# Altium PCB DE-120824_1.PcbDoc
Units mil, origin at the board's own origin, x right, y up, seen from the top; angles counter-clockwise.
Board outline 2559.06 x 1377.95 mil, 2 copper layers (Top Layer, Bottom Layer); 20 components, 186 nets, 62 pads, 5 vias.
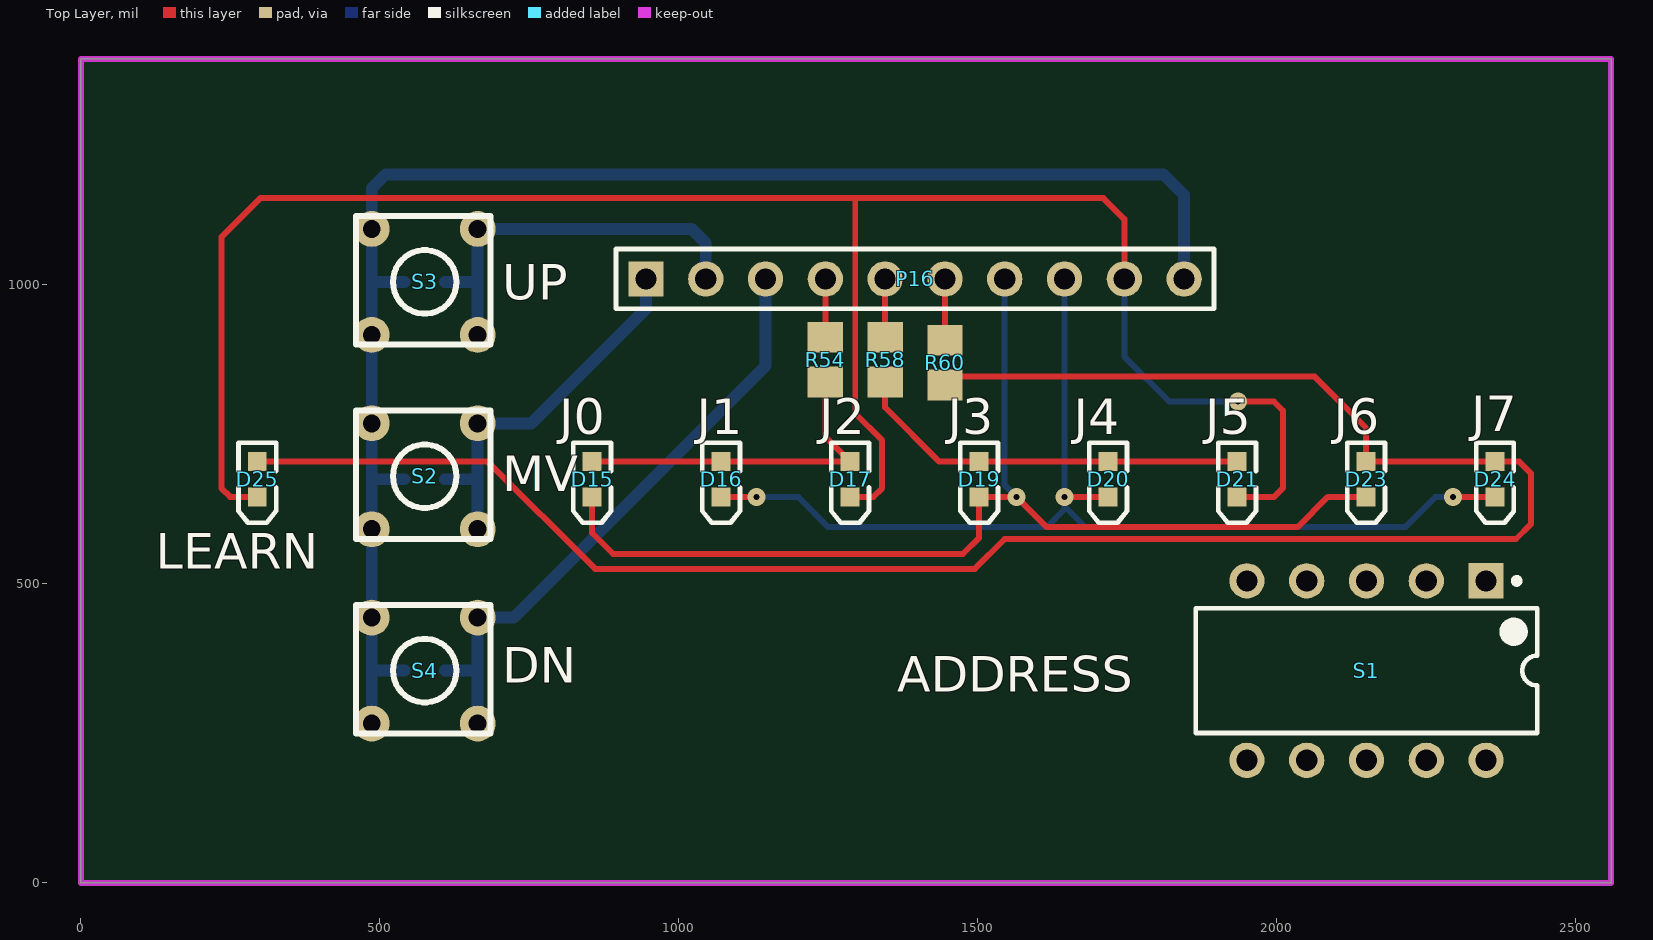
[diagram p0: Top Layer view]
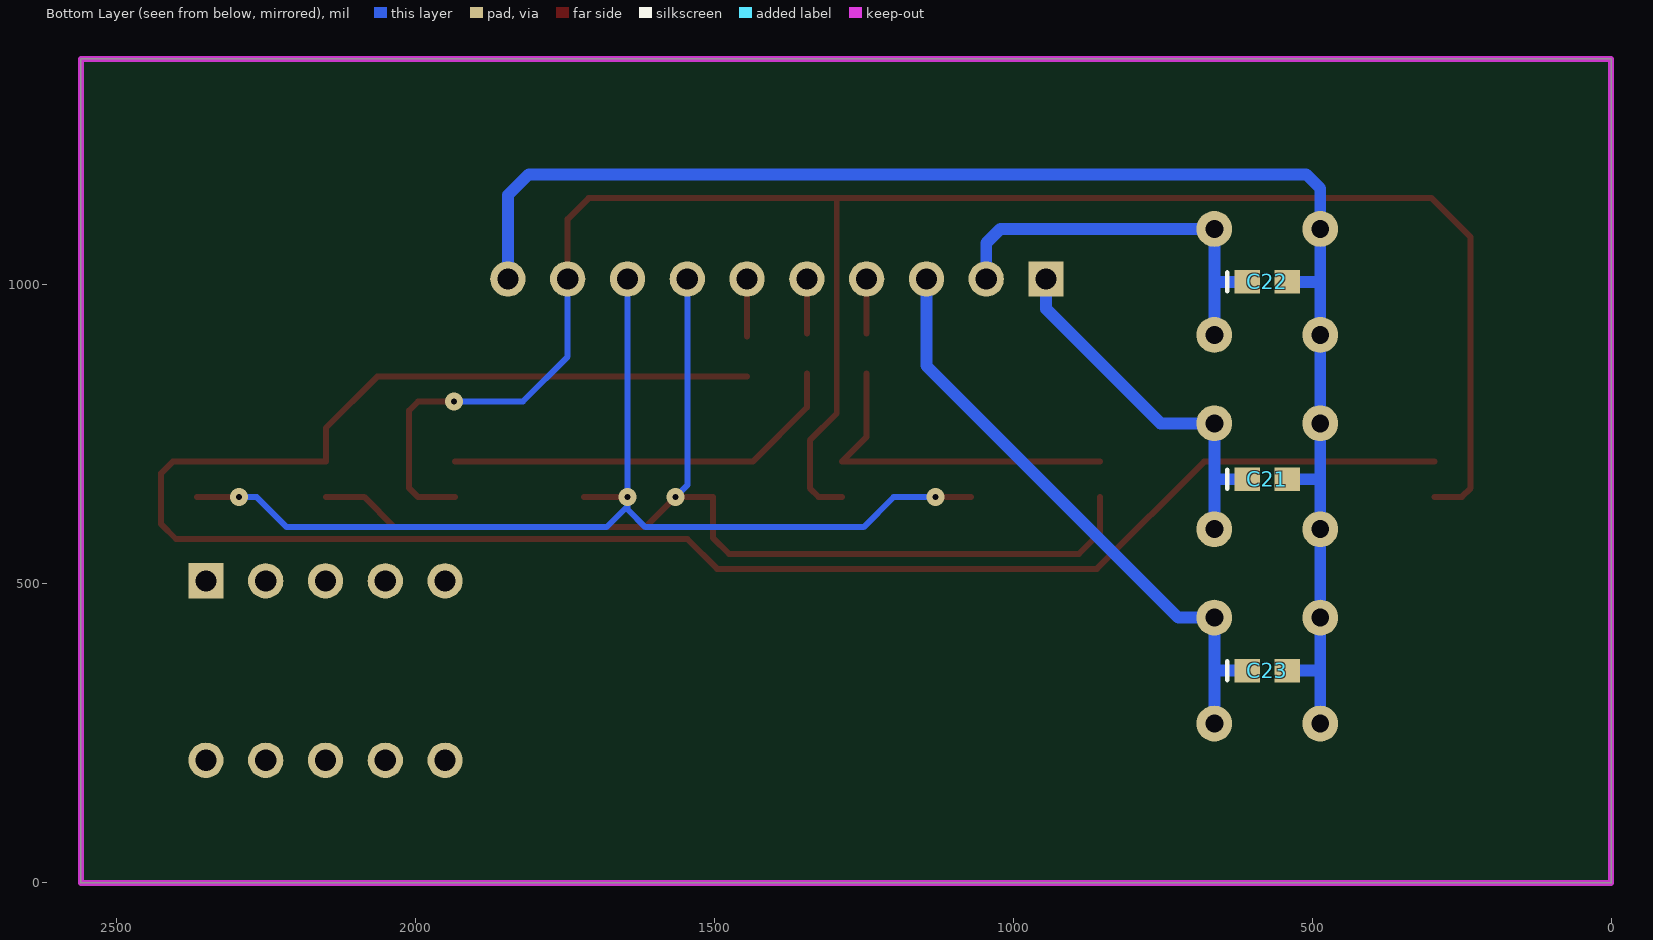
[diagram p1: Bottom Layer view, seen from below]

## Layer stack, top to bottom
Top Solder: solder mask 0.4, Solder Resist, Dk 3.5
Top Layer: signal copper 1.4
Dielectric 1: dielectric 12.6, FR-4, Dk 4.8
Bottom Layer: signal copper 1.4
Bottom Solder: solder mask 0.4, Solder Resist, Dk 3.5

## Board outline
0,0 0,1377.95 2559.06,1377.95 2559.06,0

## Design rules (kind name [scope] priority, off if disabled: settings)
Clearance [All] p1: gap=10 ignorepadtopadclearanceinfootprint=FALSE
PolygonConnect [All] p1: connectstyle=Relief reliefconductorwidth=10 reliefentries=4 polygonreliefangle="90 Angle" airgapwidth=10
RoutingVias [All] p1: holewidth=28 width=50 viastyle="Through Hole" minholewidth=10 minwidth=30 maxholewidth=28 maxwidth=50
SolderMaskExpansion [All] p1: expansion=4 istentingtop=FALSE
SupplyNets "Schematic Supply Nets_8" [InNet('GND1')] p1: voltage=0.000
SupplyNets "Schematic Supply Nets_7" [InNet('3V3')] p2: voltage=0.000
SupplyNets "Schematic Supply Nets_6" [InNet('L')] p3: voltage=0.000
SupplyNets "Schematic Supply Nets_5" [InNet('GND')] p4: voltage=0.000
SupplyNets "Schematic Supply Nets_4" [InNet('F')] p5: voltage=0.000
SupplyNets "Schematic Supply Nets_3" [InNet('F2')] p6: voltage=0.000
SupplyNets "Schematic Supply Nets_2" [InNet('F1')] p7: voltage=0.000
SupplyNets "Schematic Supply Nets_1" [InNet('12V')] p8: voltage=0.000
SupplyNets "Schematic Supply Nets" [InNet('5V')] p9: voltage=0.000
Width [All] p1: maxlimit=100 minlimit=10 preferedwidth=20
30 further rules are at their usual default settings.

## Classes and differential pairs
component class DE-120824: P2 P3 P4 P5 P6 P7 S1 U1 U5 U6

## Components (designator, comment, footprint, x,y, rotation, side; value= is the part's Value field where it differs from the comment)
C21 "C0603" 0603 575,675 r180 bottom value=100nF
C22 "C0603" 0603 575,1005 r180 bottom value=100nF
C23 "C0603" 0603 575,355 r180 bottom value=100nF
D15 "LED0" 1.6X0.8X0.8 855,675 r270 top
D16 "LED3" 1.6X0.8X0.8 1070.71,675 r270 top
D17 "LED6" 1.6X0.8X0.8 1286.43,675 r270 top
D19 "LED1" 1.6X0.8X0.8 1502.14,675 r270 top
D20 "LED4" 1.6X0.8X0.8 1717.86,675 r270 top
D21 "LED6" 1.6X0.8X0.8 1933.57,675 r270 top
D23 "LED2" 1.6X0.8X0.8 2149.29,675 r270 top
D24 "LED5" 1.6X0.8X0.8 2365,675 r270 top
D25 "LED7" 1.6X0.8X0.8 295,675 r270 top
P16 "Header 10" HDR1X10 945,1010 r0 top
R54 "220R" ERA-0805 1245,875 r270 top
R58 "220R" ERA-0805 1345,875 r270 top
R60 "220R" ERA-0805 1445,870 r270 top
S1 "SW DIP-5" N10A 2150,355 r270 top
S2 "MOVE" TACTILE_SWITCH 575,680 r180 top
S3 "UP" TACTILE_SWITCH 575,1005 r180 top
S4 "DOWN" TACTILE_SWITCH 575,355 r180 top

## Footprints (in the part's own frame and the unit in brackets; to place one, negate y for a bottom-side part, rotate by r counter-clockwise, add the part's x,y. Pads: shape width x height; smd on the part's side, far side on the other; paste and mask are expansions set on the pad)
1.6X0.8X0.8 [mm] "SM LED; 2 Flat Leads"
  rect 0.8x0.8 smd: 1(-0.75,0) 2(0.75,0)
  silkscreen extent -1.55,-0.8 1.85,0.8
0603 [mm] "Chip Capacitor; Body 1.6 x 0.8 mm (LxW typ)"
  rect 1.1x1 smd: 1(-0.85,0) 2(0.85,0)
  silkscreen extent -1.7,-0.4 -1.7,0.4
ERA-0805 [mm] "Chip Resistor; Body 2 x 1.3 mm (LxW typ)"
  rect 1.3x1.5 smd: 1(-0.95,0) 2(0.95,0)
HDR1X10 [mm] "Connector; Header; 10 Position"
  rect 1.5x1.5 hole 0.9: 1(0,0)
  round 1.5 hole 0.9: 2(2.54,0) 3(5.08,0) 4(7.62,0) 5(10.16,0) 6(12.7,0) 7(15.24,0) 8(17.78,0) 9(20.32,0) 10(22.86,0)
  silkscreen extent -1.27,-1.27 24.13,1.27
N10A [mm] "DIP; 10 Leads; Row Spacing 7.62 mm; Pitch 2.54 mm"
  rect 1.5x1.5 hole 0.9: 1(-3.81,5.08)
  round 1.5 hole 0.9: 2(-3.81,2.54) 3(-3.81,0) 4(-3.81,-2.54) 5(-3.81,-5.08) 6(3.81,-5.08) 7(3.81,-2.54) 8(3.81,0) 9(3.81,2.54) 10(3.81,5.08)
  silkscreen extent -3.93,-7.25 2.65,7.25, body extent -3.25,-7.25 3.25,7.25, height 5.08
TACTILE_SWITCH [mil] "PCB push button"
  round 60 hole 30: 1(-88.58,88.58) 2(88.58,88.58) 3(88.58,-88.58) 4(-88.58,-88.58)
  silkscreen extent -110,-110 115,105

## Part data
C21 C22 C23: "Ceramic Chip Capacitor - Standard", PackageDocument=Mar-2001, Code_IPC="1608 [0603]", Code_JEITA=0603, ComponentLink1Description="Manufacturer Link", ComponentLink1URL=http://www.kemet.com/, ComponentLink2Description=Datasheet, ComponentLink2URL=http://www.kemet.com/kemet/web/homepage/kechome.nsf/vapubfilesname/F3102TA.pdf/$file/F3102TA.pdf, DatasheetDocument=Mar-2001, LatestRevisionDate=19-Mar-2004, LatestRevisionNote="Silkscreen size reduced.", Note="Footprint corresponds to dimensions for bulk cassette packaging. This case size has tightened tolerances.", PackageReference=0603, Published=17-Jul-2002, Publisher="Altium Limited"
D15 D16 D17 D19 D20 D21 D23 D24 D25: library part HSMB-C190, "Blue Surface Mount Chip LED, Blue", LED_Colour=Blue, ComponentLink1Description="Manufacturer Link", ComponentLink1URL=http://www.avagotech.com/, ComponentLink2Description=Datasheet, ComponentLink2URL=http://cp.literature.agilent.com/litweb/pdf/5988-5211EN.pdf, DatasheetVersion=26-Feb-2002, LuminousIntensity="1.6mcd (Minimum).", PackageDescription="SM LED; 2 Flat Leads", PackageReference=1.6X0.8X0.8, PackageVersion=Mar-2002, PCB_Layout="Complies with manufacturer's recommendation.", Published=11-Dec-2002, Publisher="Altium Limited"
P16: "Header, 10-Pin", LatestRevisionDate=17-Jul-2002, LatestRevisionNote="Re-released for DXP Platform.", Publisher="Altium Limited"
R54 R58 R60: library part ERAS, "Metal Film Thermosensitive Chip Resistor, 0.56 Ohm to 10k Ohm Range, 5% Tolerance, 0805 Size, 0.1 W", PackageDocument=Mar-2003, Code_IPC="2012 [0805]", ComponentLink1Description="Manufacturer Link", ComponentLink1URL=http://www.panasonic.com/industrial/components/resistive_products.htm, ComponentLink2Description=Datasheet, ComponentLink2URL=http://www.panasonic.com/industrial/components/pdf/AOF0000CE1.pdf, LatestRevisionDate=19-Mar-2004, LatestRevisionNote="Silkscreen size reduced.", Note="If flow soldering, adjust pad width of PCB Footprint to 0.7 - 0.8 times the width of the resistor.", PackageReference=ERA-0805, Published=17-Dec-2003, Publisher="Altium Limited"
S1: "DIP Switch, 5 Position, SPST", LatestRevisionDate=17-Jul-2002, LatestRevisionNote="Re-released for DXP Platform.", PackageReference=N10A, Published=24-Mar-1999, Publisher="Altium Limited"
S2 S3 S4: library part TACKTILE_SWITCH

## Via types
v1: diameter 30, hole 10, Top Layer to Bottom Layer, 5 vias

## Nets (pads, with @x,y where several pads share a name; then routed paths per layer and width w, separated by ;. In a path a pad name is that pad's centre, name@x,y a point inside that pad or via, vN(x,y) a via of type N, cw(c..) or ccw(c..) an arc to the next point about the centre after c; other vN are vias at no path point)
3V3: 
5V: 
12V: 
ADDRESS0: 
ADDRESS1: 
ADDRESS2: 
ADDRESS3: 
ADDRESS4: 
BTN_DN: 
BTN_MOVE: 
BTN_UP: 
BTNDN: C23.1 P16.3 S4.1 S4.4 | length 1033.3
  Bottom Layer w20: C23.1 663.58,355 ; S4.1 663.58,355 ; P16.3 1145,865 723.58,443.58 S4.4 663.58,355
BTNMV: C21.1 P16.1 S2.1 S2.4 | length 645.1
  Bottom Layer w20: C21.1 658.58,675 663.58,670 ; S2.1 663.58,670 ; P16.1 945,960 753.58,768.58 S2.4 663.58,670
BTNUP: C22.1 P16.2 S3.1 S3.4 | length 683.5
  Bottom Layer w20: C22.1 663.58,1005 ; S3.1 663.58,1005 ; P16.2 1045,1070 1021.42,1093.58 S3.4 663.58,1005
CURRENT: 
F: 
F1: 
F2: 
GND: 
GND1: C21.2 C22.2 C23.2 P16.10 S2.2 S2.3 S3.2 S3.3 S4.2 S4.3 | length 2583.2
  Bottom Layer w20: S4.2 486.42,355 ; C23.2 486.42,355 ; C21.2 486.42,675 ; C22.2 486.42,1005 ; P16.10 1845,1150 1810,1185 510,1185 486.42,1161.42 S3.3 486.42,1005 ; 486.42,355 S4.3 S2.2 486.42,675 ; 486.42,675 S2.3 S3.2 486.42,1005
I2C1_SCL: 
I2C1_SDA: 
JAL0_DN: 
JAL0_UP: 
JAL1_DN: 
JAL1_UP: 
JAL2_DN: 
JAL2_UP: 
JAL3_DN: 
JAL3_UP: 
JAL4_DN: 
JAL4_UP: 
JAL5_DN: 
JAL5_UP: 
JAL6_DN: 
JAL6_UP: 
JAL7_DN: 
JAL7_UP: 
JAL_0_DN: 
JAL_0_UP: 
JAL_1_DN: 
JAL_1_UP: 
JAL_2_DN: 
JAL_2_UP: 
JAL_3_DN: 
JAL_3_UP: 
JAL_4_DN: 
JAL_4_UP: 
JAL_5_DN: 
JAL_5_UP: 
JAL_6_DN: 
JAL_6_UP: 
JAL_7_DN: 
JAL_7_UP: 
L: 
LED_C1: 
LED_C2: 
LED_C3: 
LED_R1: 
LED_R2: 
LED_R3: 
LEDC1: D15.2 D19.2 D23.2 P16.7 | length 1863.9
  Top Layer w10: D15.2 855,585 890,550 1475,550 1502.14,577.14 D19.2 1502.61,645 v1(1565,645) 1615,595 2035,595 2085.47,645.47 D23.2
  Bottom Layer w10: P16.7 1545,665 v1(1565,645)
LEDC2: D16.2 D20.2 D24.2 P16.8 | length 1821.1
  Top Layer w10: D16.2 1129.53,645.47 v1(1130,645) ; v1(1645,645) 1717.38,645 D20.2 ; v1(2295,645) 2295.47,645.47 D24.2
  Bottom Layer w10: v1(1130,645) 1200,645 1250,595 1615,595 1645,625 1645,630 ; P16.8 v1(1645,645) 1645,630 ; v1(2295,645) 2265,645 2215,595 1680,595 1645,630
LEDC3: D17.2 D21.2 D25.2 P16.9 | length 3345.4
  Top Layer w10: D25.2 249.53,645.47 235,660 235,1080 300,1145 1295,1145 ; D17.2 1325.47,645.47 1340,660 1340,740 1295,785 1295,1145 ; P16.9 1745,1110 1710,1145 1295,1145 ; D21.2 1995.47,645.47 2010,660 2010,790 1995,805 v1(1935,805)
  Bottom Layer w10: P16.9 1745,880 1820,805 v1(1935,805)
LEDR1: P16.4 R54.1 | length 91.5
  Top Layer w10: R54.1@1245,918.46 P16.4
LEDR2: P16.5 R58.1 | length 91.5
  Top Layer w10: R58.1@1345,918.46 P16.5
LEDR3: P16.6 R60.1 | length 96.5
  Top Layer w10: R60.1@1445,913.46 P16.6
NetC6_2: 
NetC10_2: 
NetC13_2: 
NetD1_2: 
NetD2_1: 
NetD2_3: 
NetD3_1: 
NetD3_3: 
NetD4_1: 
NetD4_3: 
NetD5_1: 
NetD5_3: 
NetD6_1: 
NetD6_3: 
NetD7_1: 
NetD7_3: 
NetD8_1: 
NetD8_3: 
NetD9_1: 
NetD9_3: 
NetD10_1: 
NetD10_3: 
NetD11_1: 
NetD11_3: 
NetD12_1: 
NetD12_3: 
NetD13_1: 
NetD13_3: 
NetD14_1: 
NetD14_3: 
NetD15_1: D15.1 D16.1 D17.1 R54.2 | length 595.6
  Top Layer w10: D15.1 D16.1 D17.1 1245,745.96 R54.2@1245,851.54
NetD18_1: 
NetD18_3: 
NetD19_1: D19.1 D20.1 D21.1 R58.2 | length 682.6
  Top Layer w10: R58.2@1345,851.54 1345,795 1435.47,704.53 D19.1 D20.1 D21.1
NetD22_1: 
NetD22_3: 
NetD23_1: D23.1 D24.1 D25.1 R60.2 | length 3400.3
  Top Layer w10: D25.1 680.47,704.53 860,525 1495,525 1545,575 2400,575 2425,600 2425,685 2405.47,704.53 D24.1 D23.1 2149.29,760.71 2063.46,846.54 R60.2@1445,846.54
NetD26_1: 
NetD26_3: 
NetK1_4: 
NetP1_1: 
NetP1_2: 
NetP2_2: 
NetP2_5: 
NetP2_8: 
NetP2_11: 
NetP3_2: 
NetP3_5: 
NetP3_8: 
NetP3_11: 
NetP15_1: 
NetP15_2: 
NetP15_3: 
NetP15_4: 
NetP15_5: 
NetP15_6: 
NetP15_7: 
NetP15_8: 
NetP15_9: 
NetP15_10: 
NetP15_11: 
NetP15_12: 
NetP18_1: 
NetP18_2: 
NetP18_3: 
NetP18_4: 
NetP18_5: 
NetP18_6: 
NetP18_7: 
NetP18_8: 
NetP18_9: 
NetP18_10: 
NetP18_11: 
NetP18_12: 
NetQ1_1: 
NetR2_2: 
NetR3_2: 
NetR4_2: 
NetR8_1: 
NetR9_2: 
NetR12_1: 
NetR12_2: 
NetR13_2: 
NetR15_1: 
NetR15_2: 
NetR16_2: 
NetR18_2: 
NetR20_2: 
NetR24_1: 
NetR24_2: 
NetR25_2: 
NetR27_1: 
NetR27_2: 
NetR28_2: 
NetR30_2: 
NetR32_2: 
NetR36_1: 
NetR36_2: 
NetR37_2: 
NetR39_1: 
NetR39_2: 
NetR40_2: 
NetR42_2: 
NetR44_2: 
NetR48_1: 
NetR48_2: 
NetR49_2: 
NetR51_1: 
NetR51_2: 
NetR52_2: 
NetR55_2: 
NetR57_2: 
NetU4_14: 
RELAY: 
SWCLK: 
SWDIO: 
USART1_DE: 
USART1_RX: 
USART1_TX: 
pads on no net: S1.1 S1.2 S1.3 S1.4 S1.5 S1.6 S1.7 S1.8 S1.9 S1.10

## Keep-outs
Keep-Out Layer:
  the board outline again, w10

## Silkscreen, mask and mechanical layers (free items; w line width, h text height)
Top Overlay:
  text "UP" at 705,975 h60
  text "J7" at 2325,755 h60
  text "J0" at 800,750 h60
  text "J1" at 1030,750 h60
  text "J2" at 1235,750 h60
  text "J3" at 1450,750 h60
  text "J4" at 1660,750 h60
  text "J5" at 1880,750 h60
  text "J6" at 2095,750 h60
  text "MV" at 705,655 h60
  text "LEARN" at 125,525 h60
  text "DN" at 705,335 h60
  text "ADDRESS" at 1365,320 h60